# Altium PCB PCBLM386.pcbdoc
Units mm, origin at the board's own origin, x right, y up, seen from the top; angles counter-clockwise.
Board outline 73.58 x 72.47 mm, 2 copper layers (Top Layer, Bottom Layer); 18 components, 12 nets, 52 pads, 0 vias.
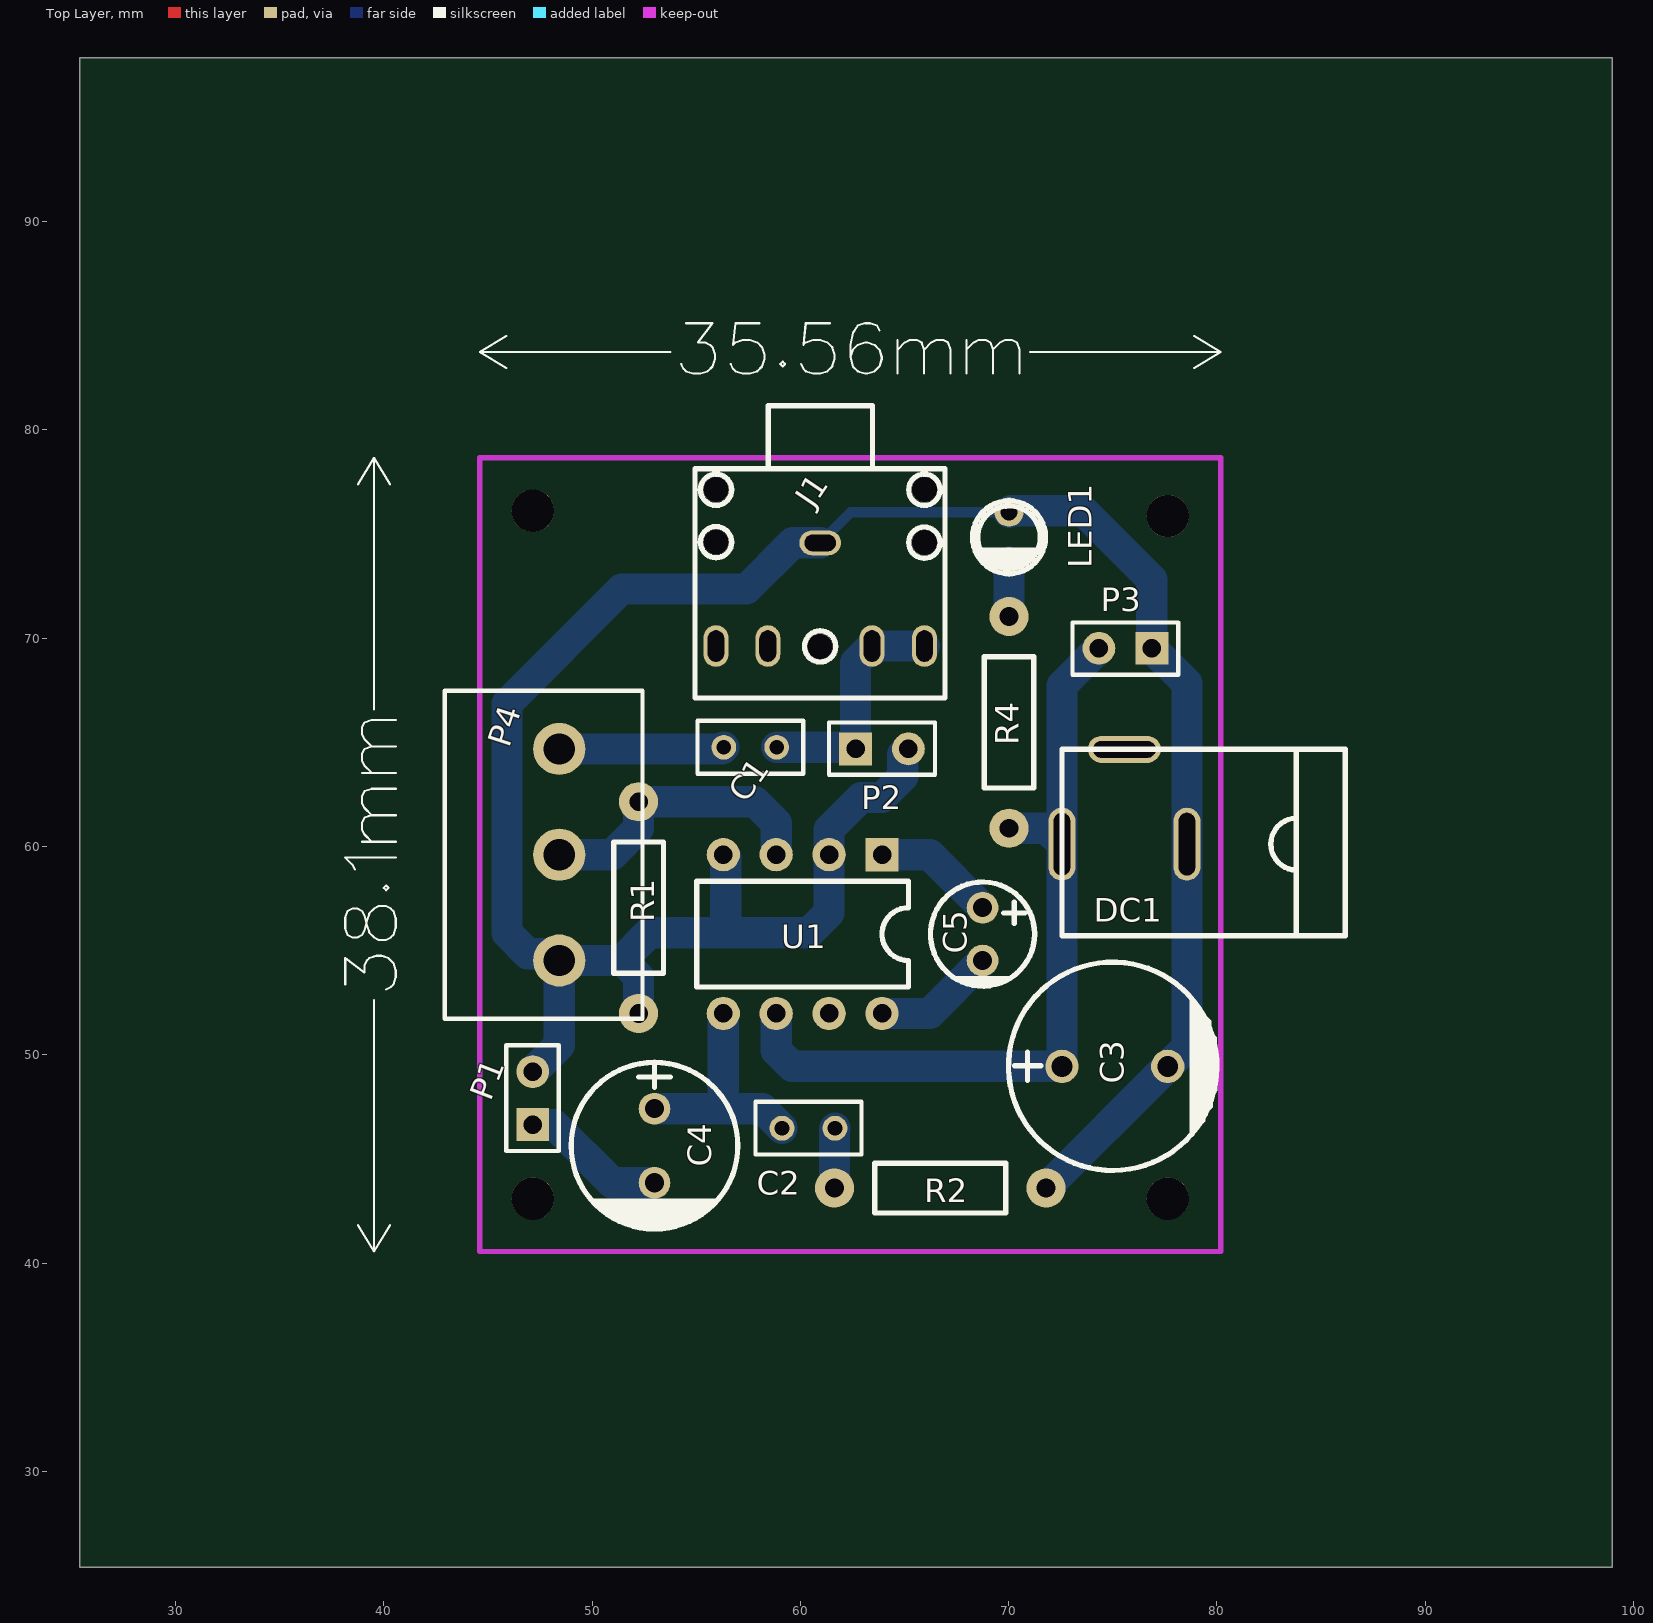
[diagram p0: Top Layer view]
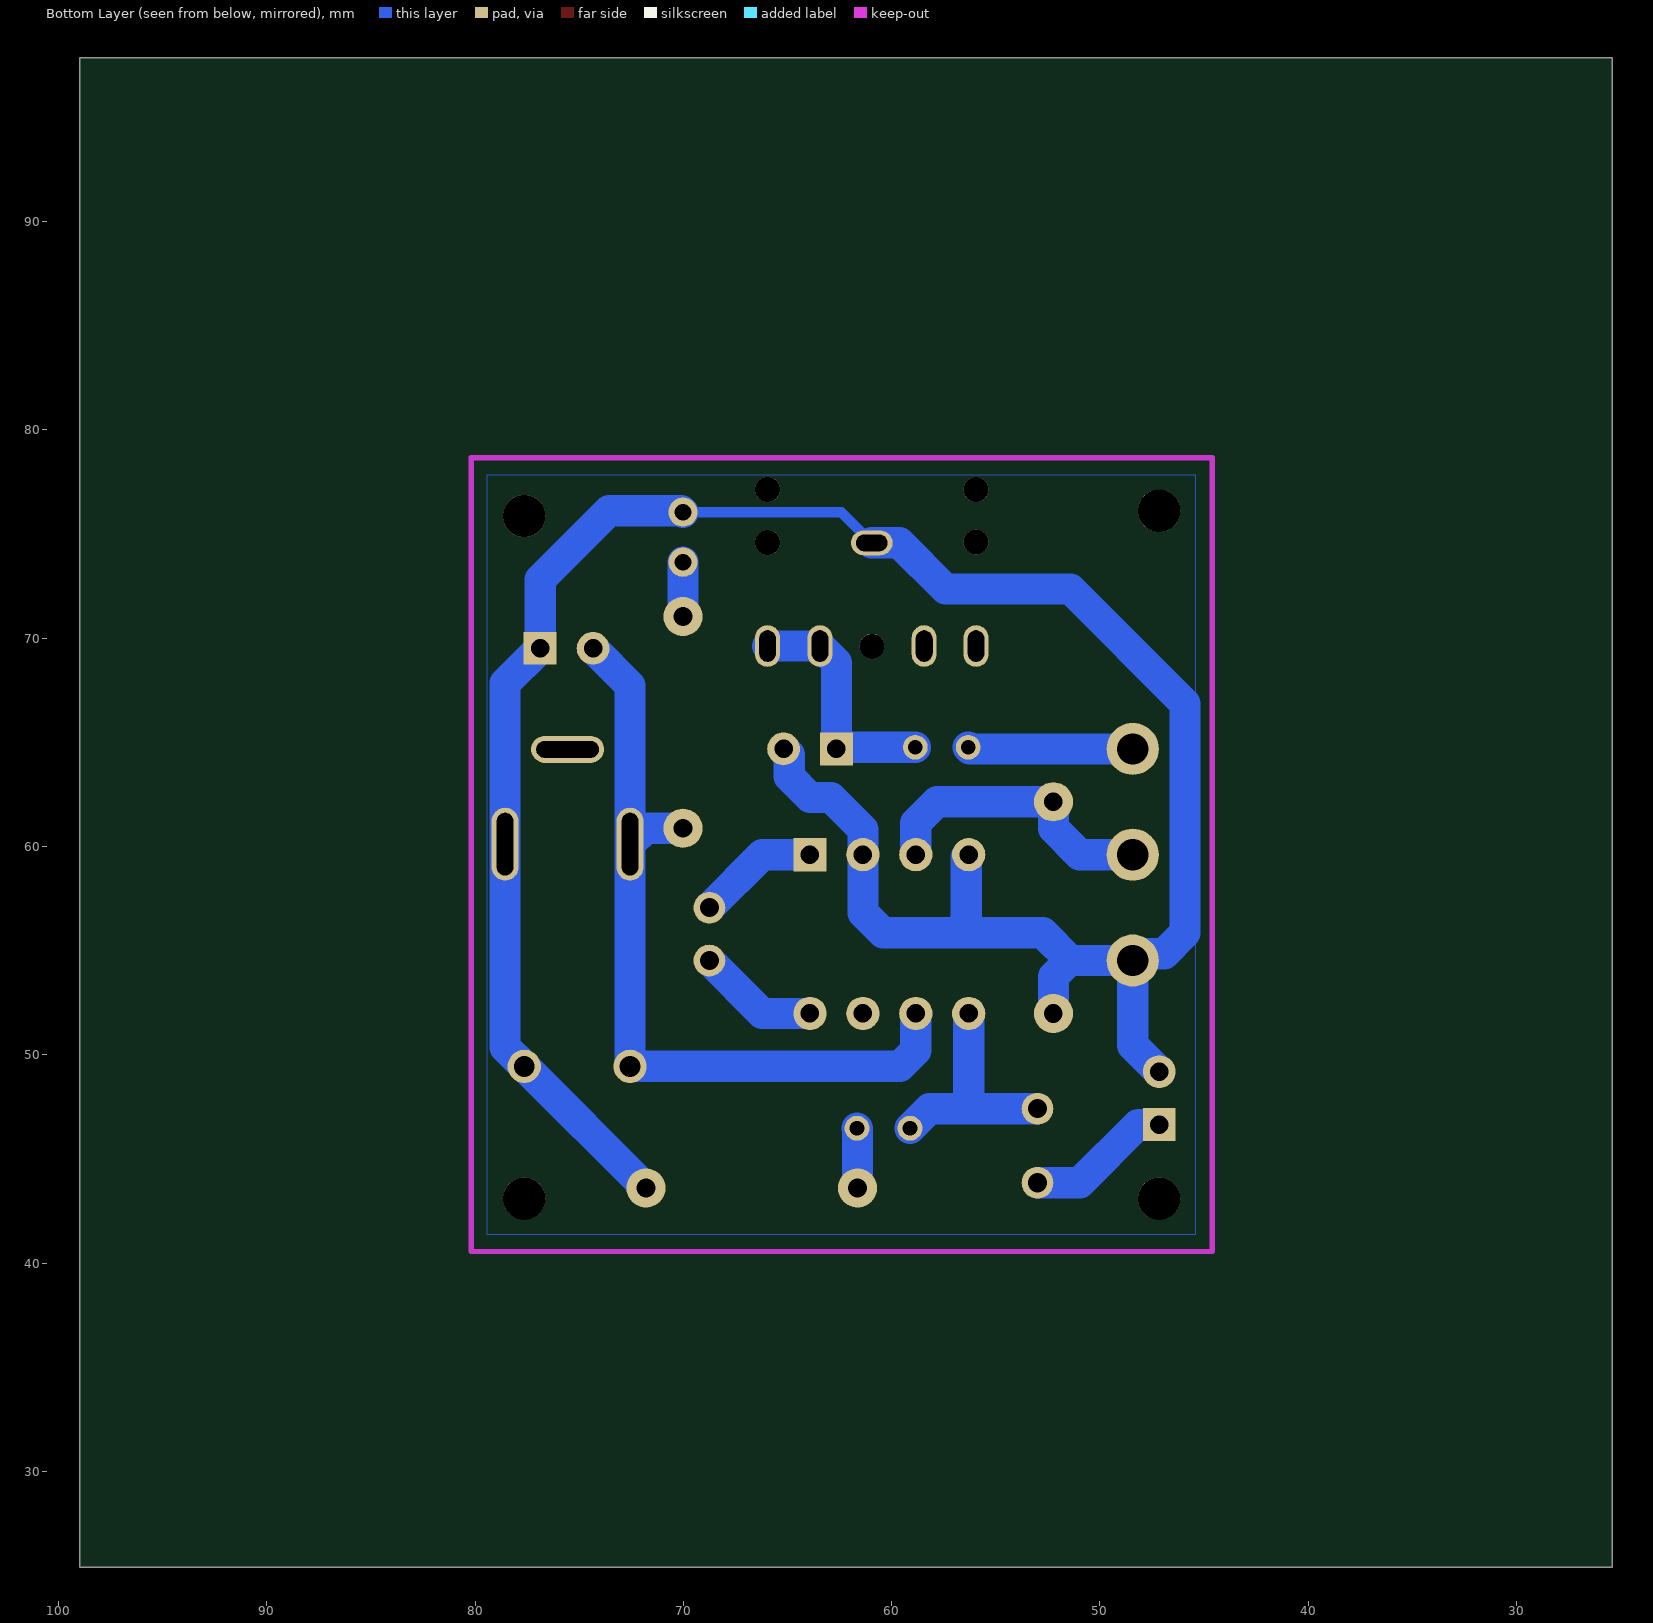
[diagram p1: Bottom Layer view, seen from below]

## Layer stack, top to bottom
Top Layer: signal copper (thickness not stored)
Dielectric: dielectric 0.32, FR-4, Dk 4.8
Bottom Layer: signal copper (thickness not stored)

## Board outline
98.983,25.4 25.4,25.4 25.4,97.867 98.983,97.867

## Components (designator, comment, footprint, x,y, rotation, side; value= is the part's Value field where it differs from the comment)
C1 "100nF" RAD-0.1 57.824,64.936 r180 top
C2 "100nF" RAD-0.1 60.618,46.648 r180 top
C3 "1000uF" CAP-D10.0XF5.0 72.556,49.442 r90 top
C4 "100uF" CAP-D8.0XF3.5 52.998,45.632 r270 top
C5 "10uF" CAP-D5.0XF2.0 68.746,55.792 r270 top
DC1 "DC-005_1" DC-5020 72.556,60.11 r180 top
J1 "Audio-PJ307C" AUDIO-PJ307C 65.952,77.128 r0 top
LED1 "3AR2PD08" LED-3MM 70.016,74.842 r270 top
P1 "Header-Female-2.54_1x2" HDR-1X2/2.54 47.156,46.648 r90 top
P2 "Header-Female-2.54_1x2" HDR-1X2/2.54 62.65,64.682 r0 top
P3 "Header-Female-2.54_1x2" HDR-1X2/2.54 76.874,69.508 r180 top
P4 "CH5.08-3A" CH5.08-3A 48.426,64.682 r270 top
R1 "4.7KΩ" AXIAL-0.4 52.236,57.062 r270 top
R2 "4.7KΩ" AXIAL-0.4 66.714,43.6 r180 top
R4 "10KΩ" AXIAL-0.4 70.016,65.952 r270 top
U1 "LM386L-2-D08-T" DIP-8 61.38,57.062 r180 top
? "" ? 62.396,83.905 r0 top
? "" ? 39.364,59.602 r0 top

## Footprints (in the part's own frame and the unit in brackets; to place one, negate y for a bottom-side part, rotate by r counter-clockwise, add the part's x,y. Pads: shape width x height; smd on the part's side, far side on the other; paste and mask are expansions set on the pad)
AUDIO-PJ307C [mm]
  round 1.2 hole 1.2: 0(-10.003,-2.515) 0(-10.003,0) 0(-5.001,-7.521) 0(0,-2.54) 0(0,0)
  oval 2x1.2 hole 0.8 slot 1.5 at 0 deg: 1(-5.001,-2.555)
  oval 1.2x2 hole 0.8 slot 1.5 at 90 deg: 2(0.003,-7.508) 3(-2.512,-7.508) 4(-7.513,-7.508) 5(-10.005,-7.508)
  silkscreen extent -11.01,-10 0.99,4.02
AXIAL-0.4 [mil]
  round 74 hole 35.4: 1(-200,0) 2(200,0)
  silkscreen extent -124,-47 124,47
CAP-D5.0XF2.0 [mil]
  round 60 hole 36: 1(-50,0) 2(50,0)
  silkscreen extent -98,-98 100,98
CAP-D8.0XF3.5 [mil]
  round 60 hole 36: 1(-70,0) 2(70,0)
  silkscreen extent -158,-158 160,158
CAP-D10.0XF5.0 [mm]
  round 1.6 hole 1: 1(0,0) 2(0,-5.08)
  silkscreen extent -5,-7.54 5,2.56
CH5.08-3A [mm]
  round 2.5 hole 1.5: 1(0,0) 2(5.08,0) 3(10.16,0)
  silkscreen extent -2.79,-5.5 12.95,4
DC-5020 [mm]
  oval 1.3x3.5 hole 0.8 slot 3 at 90 deg: 1(0,0) 3(-5.999,0)
  oval 3.5x1.3 hole 0.8 slot 3 at 0 deg: 2(-3,-4.549)
  silkscreen extent -13.6,-4.55 0,4.4
DIP-8 [mil]
  rect 63x63 hole 35: 1(-100,-100)
  round 63 hole 35: 2(0,-100) 3(100,-100) 4(200,-100) 5(200,200) 6(100,200) 7(0,200) 8(-100,200)
  silkscreen extent -150,-50 250,150
HDR-1X2/2.54 [mil]
  rect 62x62 hole 35: 1(0,0)
  round 62 hole 35: 2(100,0)
  silkscreen extent -50,-49 150,50
LED-3MM [mm]
  round 1.4 hole 0.8: 1(-1.204,0.003) 2(1.199,0.003)
  silkscreen extent -1.75,-1.75 1.75,1.75
RAD-0.1 [mil]
  round 47 hole 28: 1(-41,7) 2(59,7)
  silkscreen extent -91,-43 109,57
? [mm]
  silkscreen extent -17.78,-1.21 17.78,1.21

## Free pads (board coordinates)
  round 2.032 hole 2.032 unplated: ""(47.156,43.092) ""(47.156,76.112) ""(77.636,43.092) ""(77.636,75.858)

## Nets (pads, with @x,y where several pads share a name; then routed paths per layer and width w, separated by ;. In a path a pad name is that pad's centre, name@x,y a point inside that pad or via, vN(x,y) a via of type N, cw(c..) or ccw(c..) an arc to the next point about the centre after c; other vN are vias at no path point)
$BOARDOUTLINENET: 
C1_2: C1.2 P4.1 | length 7.9
  Bottom Layer w1.5: P4.1 56.25,64.682 C1.2
C2_1: C2.1 R2.2 | length 2.9
  Bottom Layer w1.5: R2.2 61.634,46.445 C2.1
GND: C3.2 DC1.3 J1.1 LED1.1 P1.2 P2.2 P3.1 P4.3 R1.2 R2.1 U1.2 U1.4 | length 119.6
  Bottom Layer w0.5: J1.1 62.424,76.046 LED1.1
  Bottom Layer w1.5: P1.2 48.426,50.458 P4.3 ; 51.416,54.522 52.747,55.853 56.918,55.853 ; R1.2 52.236,53.76 51.474,54.522 P4.3 ; U1.4 56.416,59.486 56.416,56.352 56.917,55.852 57.916,55.852 60.416,55.852 61.38,56.816 U1.2 61.38,60.816 62.916,62.352 63.916,62.352 64.916,63.352 64.916,64.408 P2.2 ; J1.1 59.637,74.573 57.416,72.352 51.416,72.352 45.916,66.852 45.916,55.852 46.916,54.852 48.096,54.852 P4.3 ; LED1.1 70.085,76.112 73.572,76.112 76.874,72.81 P3.1 78.556,67.827 DC1.3 78.556,50.361 C3.2 R2.1
IN: C1.1 J1.2 J1.3 P2.1 | length 11.6
  Bottom Layer w1.5: C1.1 62.574,64.758 P2.1 62.65,68.83 J1.3 J1.2
IN3: P4.2 R1.1 U1.3 | length 14.2
  Bottom Layer w1.5: P4.2 50.966,59.602 52.236,60.872 R1.1 57.824,62.142 58.84,61.126 U1.3
LED1_2: LED1.2 R4.1 | length 2.6
  Bottom Layer w1.5: R4.1 70.019,71.035 LED1.2
OUT: C2.2 C4.1 U1.5 | length 11.1
  Bottom Layer w1.5: C4.1 58.18,47.41 C2.2 ; 56.3,47.41 U1.5
OUT_SP: C4.2 P1.1 | length 7
  Bottom Layer w1.5: P1.1 48.172,46.648 50.966,43.854 C4.2
U1_1: C5.1 U1.1 | length 5.9
  Bottom Layer w1.5: U1.1 66.206,59.602 C5.1
U1_8: C5.2 U1.8 | length 5.9
  Bottom Layer w1.5: U1.8 66.206,51.982 C5.2
VCC: C3.1 DC1.1 P3.2 R4.2 U1.6 | length 39.5
  Bottom Layer w1.5: U1.6 58.84,50.204 59.602,49.442 C3.1 DC1.1 ; R4.2 71.794,60.872 DC1.1 ; P3.2 72.556,67.73 DC1.1
pads on no net: DC1.2 J1.0 J1.4 J1.5 U1.7

## Polygon pours and split planes (outlines as drawn)
GND on Bottom Layer (solid): 45.416,77.852 45.416,41.352 79.416,41.352 79.416,77.852